# EAGLE board kiwi_exigeant (EAGLE 9.6.0)
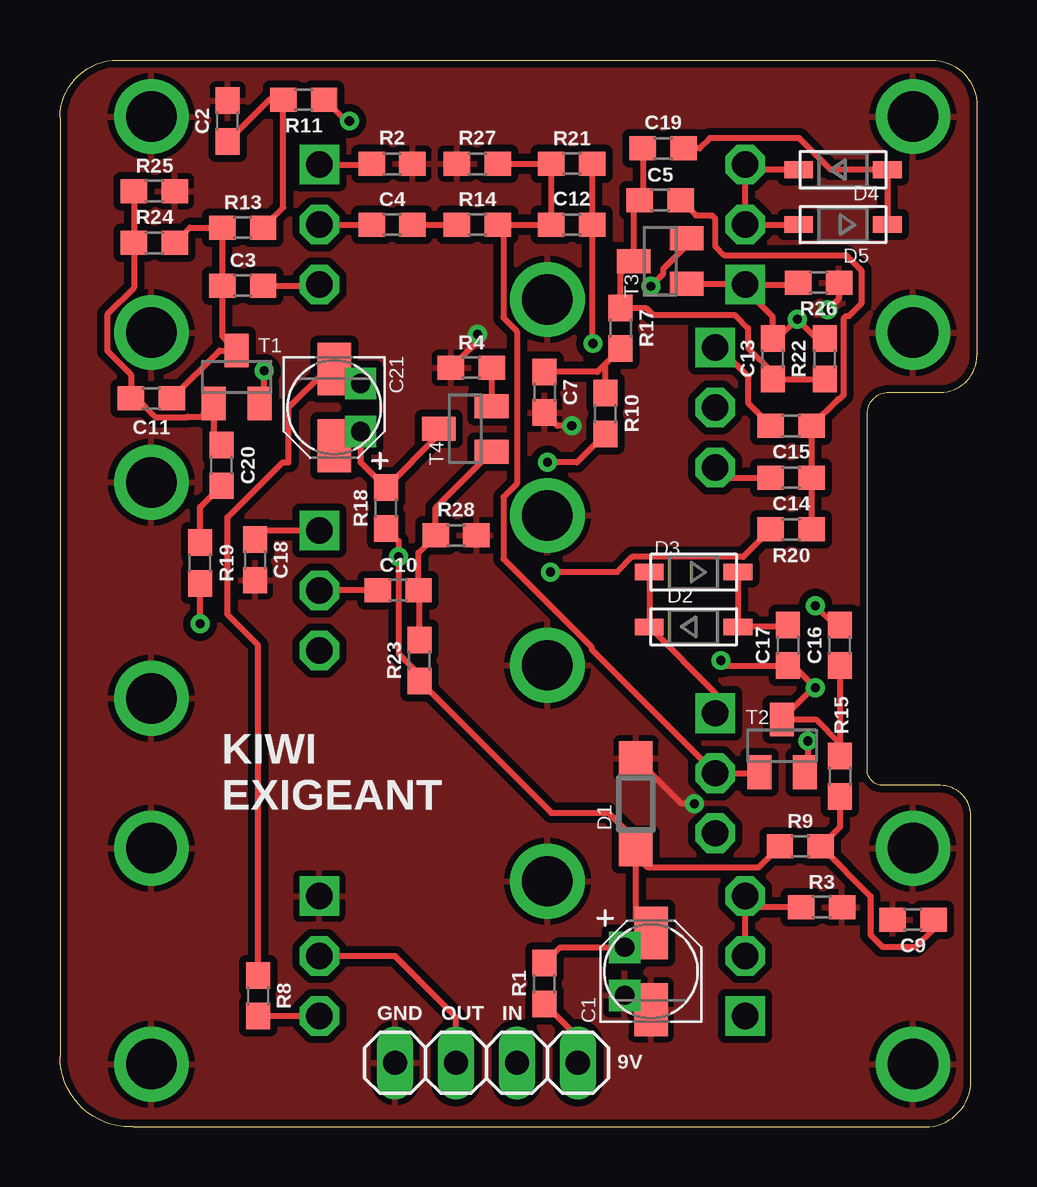
[diagram p0: board, top side]
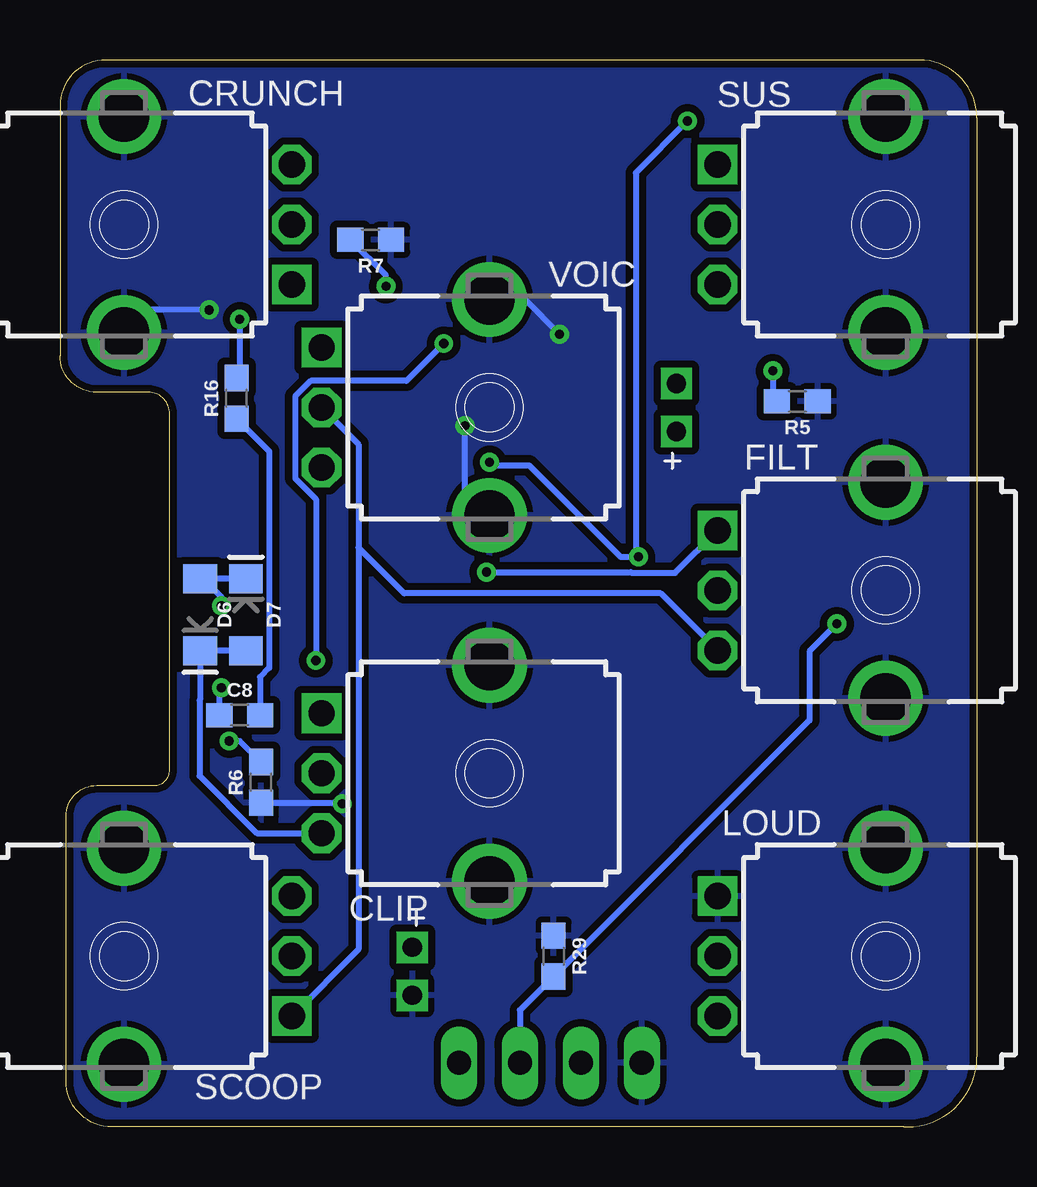
[diagram p1: board, bottom side, seen from below]

Size 38.23 x 44.45 mm. Coordinates in mm from the lower left corner, seen from the top.
Outline: 3.05,0 36.07,0 arc90 37.97,1.91 37.97,12.95 arc90 36.7,14.22 34.29,14.22 arc-90 33.66,14.86 33.66,29.72 arc-90 34.54,30.61 36.7,30.61 arc90 38.23,32.13 38.23,42.55 arc90 36.32,44.45 2.41,44.45 arc90 0,42.04 0,2.92 arc90 2.92,0 3.05,0
Copper layers (1*16): Top 0.035mm / dielectric 1.5mm / Bottom 0.035mm
Design rules "default *": minimum track width 6mil, minimum drill 0.35mm, track to track 6mil, track to pad 6mil, pad to pad 6mil, via to via 6mil, smd to smd 6mil, copper to edge 10mil, drill to drill 6mil, minimum pad ring 10mil, minimum via ring 8mil, stop-mask expansion 4mil, vias tented up to drill 0mil, thermal gap 10mil

## Footprints (pad centres in the part's own frame; a part is rotated, then mirrored left to right if it is on the bottom)
PAN_B_SMD+THRU = smd 2.2 x 1.4: + 1.6,0; - -1.6,0 | drill 0.8 pad 0.9 square: ++ 1,1.1; -- -1,1.1
0603 = smd 1.1 x 1: 1 -0.85,0; 2 0.85,0
9MM_SNAP-IN_POT = drill 1.1 square: 1 -2.5,-7 | drill 1.1 octagon: 2 0,-7; 3 2.5,-7 | drill 2.1 pad 2.794: CHASSIS1 -4.5,0; CHASSIS2 4.5,0
SOD123 = smd 1.4 x 1.4: A 1.9,0; C -1.9,0
SOD-123 = smd 1.2 x 0.7: A 1.85,0; C -1.85,0
LED-1206 = smd 1.2 x 1.4: A -1.5,0; C 1.5,0
1X04 = drill 1.016 long: 1 -3.81,0; 2 -1.27,0; 3 1.27,0; 4 3.81,0
SOT23-BEC = smd 1 x 1.4: B -0.95,-1.1; C 0,1.1; E 0.95,-1.1

## Placement (x,y rotation side)
C1  100uF  [PAN_B_SMD+THRU]  24.64,6.48 90 top
C2  1.0uF  [0603]  6.99,41.91 90 top
C3  1.0uF  [0603]  7.62,35.05 0 top
C4  1.0uF  [0603]  13.84,37.59 0 top
C5  1.0uF  [0603]  25.02,38.61 0 top
C7  1.0uF  [0603]  20.19,30.61 270 top
C8  1.0uF  [0603]  30.73,17.14 0 bottom
C9  1.0uF  [0603]  35.56,8.64 180 top
C10  1.0uF  [0603]  14.1,22.35 0 top
C11  470pF  [0603]  3.81,30.35 180 top
C12  470pF  [0603]  21.34,37.59 180 top
C13  470pF  [0603]  29.72,32 90 top
C14  33nF  [0603]  30.48,27.05 180 top
C15  3.3nF  [0603]  30.48,29.21 180 top
C16  47nF  [0603]  32.51,20.07 90 top
C17  0.1uF  [0603]  30.35,20.07 90 top
C18  0.1uF  [0603]  8.13,23.62 270 top
C19  0.1uF  [0603]  25.15,40.77 180 top
C20  0.1uF  [0603]  6.73,27.56 90 top
C21  47uF  [PAN_B_SMD+THRU]  11.43,29.97 270 top
CLIP  B500K  [9MM_SNAP-IN_POT]  20.32,14.73 270 bottom
CRUNCH  A500K  [9MM_SNAP-IN_POT]  35.56,37.59 90 bottom
D1  1N5819  [SOD123]  24,13.46 90 top
D2  [SOD-123]  26.42,20.83 0 top
D3  [SOD-123]  26.42,23.11 180 top
D4  [SOD-123]  32.64,39.88 0 top
D5  [SOD-123]  32.64,37.59 180 top
D6  [LED-1206]  32.38,21.34 270 bottom
D7  [LED-1206]  30.48,21.34 90 bottom
FILT  B100K  [9MM_SNAP-IN_POT]  3.81,22.35 270 bottom
JP1  PINHD-1X4  [1X04]  17.78,2.67 180 top
LOUD  B100K  [9MM_SNAP-IN_POT]  3.81,7.11 270 bottom
R1  10  [0603]  20.19,5.97 90 top
R2  1k  [0603]  13.84,40.13 180 top
R3  1.5k  [0603]  31.75,9.14 0 top
R4  1.5k  [0603]  17.14,31.62 0 top
R5  100  [0603]  7.49,30.23 180 bottom
R6  100  [0603]  29.84,14.35 90 bottom
R7  100  [0603]  25.27,36.96 180 bottom
R8  150  [0603]  8.26,5.46 270 top
R9  4.7k  [0603]  30.86,11.68 0 top
R10  4.7k  [0603]  22.73,29.72 90 top
R11  4.7k  [0603]  10.16,42.8 180 top
R13  10k  [0603]  7.62,37.47 0 top
R14  10k  [0603]  17.4,37.59 0 top
R15  10k  [0603]  32.51,14.61 270 top
R16  10k  [0603]  30.86,30.35 90 bottom
R17  10k  [0603]  23.37,33.27 270 top
R18  10k  [0603]  13.59,25.78 90 top
R19  33k  [0603]  5.84,23.5 90 top
R20  33k  [0603]  30.48,24.89 180 top
R21  470k  [0603]  21.34,40.13 0 top
R22  470k  [0603]  31.88,32 270 top
R23  470k  [0603]  14.99,19.43 90 top
R24  470k  [0603]  3.94,36.83 180 top
R25  100k  [0603]  3.94,38.99 0 top
R26  100k  [0603]  31.62,35.18 180 top
R27  100k  [0603]  17.4,40.13 180 top
R28  100k  [0603]  16.51,24.64 180 top
R29  1M  [0603]  17.65,7.11 270 bottom
SCOOP  B50K  [9MM_SNAP-IN_POT]  35.56,7.11 90 bottom
SUS  B100K  [9MM_SNAP-IN_POT]  3.81,37.59 270 bottom
T1  3904  [SOT23-BEC]  7.37,31.24 0 top
T2  3904  [SOT23-BEC]  30.1,15.88 0 top
T3  3904  [SOT23-BEC]  25.02,36.07 90 top
T4  3904  [SOT23-BEC]  16.89,29.08 90 top
VOIC  B500K  [9MM_SNAP-IN_POT]  20.32,29.97 270 bottom

## Library data of the parts
C1 C21 CLIP CRUNCH FILT LOUD SCOOP SUS T1-T4 VOIC = MusicThingModular
C2-C5 C7-C10 = SparkFun-Capacitors; PROD_ID: CAP-00868
C11-C13 = SparkFun-Capacitors; PROD_ID: CAP-07884
C14 = SparkFun-Capacitors; PROD_ID: CAP-07887
C15 = SparkFun-Capacitors; PROD_ID: CAP-09633
C16 = SparkFun-Capacitors; PROD_ID: CAP-08605
C17-C20 = SparkFun-Capacitors; PROD_ID: CAP-08604
D1 = diode
D2-D5 = adafruit
D6 D7 = SparkFun-LED
JP1 = Connector; CATEGORY: CONNECTOR; SUB-CATEGORY: PIN-HEADER
R1 = SparkFun-Resistors; PROD_ID: RES-12581
R2-R4 = SparkFun-Resistors; PROD_ID: RES-07856
R5-R7 = SparkFun-Resistors; PROD_ID: RES-12438
R8 = SparkFun-Resistors; PROD_ID: RES-11028
R9-R11 = SparkFun-Resistors; PROD_ID: RES-07857
R13-R18 = SparkFun-Resistors; PROD_ID: RES-00824
R19 R20 = SparkFun-Resistors; PROD_ID: RES-08416
R21-R24 = SparkFun-Resistors; PROD_ID: RES-07869
R25-R28 = SparkFun-Resistors; PROD_ID: RES-07828
R29 = SparkFun-Resistors; PROD_ID: RES-07868

## Nets
CLIP1: CLIP.1 D2.C D3.A
CLIP2: C12.2 CLIP.2 R14.2 R21.1 R27.1 T2.B
CLIP3: CLIP.3 D6.C D7.A
CRU1: C13.2 CRUNCH.1 R16.2 R22.1 R26.2 T3.B
CRU2: CRUNCH.2 CRUNCH.3 D4.C D5.A
FIL1: C18.1 FILT.1 R20.2
FIL2: C10.1 FILT.2
GND: C1.- C1.-- C2.2 C7.2 C9.2 C18.2 CLIP.CHASSIS1 CLIP.CHASSIS2 CRUNCH.CHASSIS1 CRUNCH.CHASSIS2 D1.A FILT.CHASSIS1 FILT.CHASSIS2 JP1.4 LOUD.1 LOUD.CHASSIS1 LOUD.CHASSIS2 R2.1 R3.2 R4.1 R5.1 R6.1 R7.1 R25.2 R26.1 R27.2 R28.1 R29.1 SCOOP.CHASSIS1 SCOOP.CHASSIS2 SUS.CHASSIS1 SUS.CHASSIS2 VOIC.CHASSIS1 VOIC.CHASSIS2
IN: JP1.2 R19.1 R29.2
LOU3: LOUD.3 R8.2
N$1: C2.1 R11.2 R13.2
N$2: C4.2 R14.1
N$3: C16.2 D6.A D7.C
N$4: C17.2 D2.A D3.C
N$5: C8.2 R16.1
N$6: C7.1 R10.2 R17.2
N$7: C19.1 D4.A D5.C
N$8: C5.2 C14.1 C15.1 R20.1
N$10: C10.2 R23.2 R28.2 T4.B
N$11: R4.2 T4.E
N$12: C21.+ C21.++ R18.2 T4.C
N$13: C21.- C21.-- R8.1
N$22: C8.1 C12.1 C16.1 C17.1 R15.1 R21.2 T2.C
N$23: R6.2 T2.E
N$24: C20.1 R19.2
N$25: JP1.1 R1.1
N$26: C11.2 C20.2 R24.2 R25.1 T1.B
N$27: R5.2 T1.E
N$28: C3.1 C11.1 R13.1 R24.1 T1.C
N$29: C9.1 R9.2 R15.2
N$30: C5.1 C13.1 C19.2 R17.1 R22.2 T3.C
N$31: R7.2 T3.E
OUT: JP1.3 LOUD.2
SCO2: R3.1 SCOOP.2 SCOOP.3
SUS1: R2.2 SUS.1
SUS2: C4.1 SUS.2
SUS3: C3.2 SUS.3
VCC: C1.+ C1.++ D1.C R1.2 R9.1 R10.1 R11.1 R18.1 R23.1
VOI1: C15.2 VOIC.1
VOI2: FILT.3 SCOOP.1 VOIC.2
VOI3: C14.2 VOIC.3

## Tracks (layer width: path | path; a pad name or v marks a point on that pad's centre or on a via)
CLIP1
  Top 0.254: D3.A D2.C 27.32,18.07 CLIP.1
CLIP2
  Top 0.254: T2.B 29.11,14.73 CLIP.2 22.16,19.89 22.16,19.99 18.48,23.67 18.48,26.23 19.05,26.8 19.05,33.14 18.48,33.71 18.48,37.36 R14.2 C12.2 R21.1 R27.1
CLIP3
  Bottom 0.254: D7.A D6.C 32.38,17.79 32.41,17.76 32.41,14.62 30.02,12.23 CLIP.3
CRU1  (via drill 0.38)
  Top 0.254: CRUNCH.1 28.56,34.9 29.72,33.74 C13.2 29.93,32.85 v30.73,33.66 31.54,32.85 R22.1 | T3.B 28.53,35.12 CRUNCH.1 | CRUNCH.1 30.69,35.09 R26.2
  Bottom 0.254: v30.73,33.66 30.73,31.33 R16.2
CRU2
  Top 0.254: D5.A CRUNCH.2 CRUNCH.3 28.77,39.88 D4.C
FIL1  (via drill 0.38)
  Top 0.254: C18.1 8.51,24.85 FILT.1 | R20.2 28.48,23.74 23.85,23.74 23.22,23.11 v20.45,23.11
  Bottom 0.254: v20.45,23.11 14.44,23.11 14.4,23.08 12.59,23.08 FILT.1
FIL2
  Top 0.254: C10.1 FILT.2
GND  (via drill 0.38)
  Top 0.254: v21.34,29.21 20.74,29.21 C7.2 | R4.1 17.4,32.73 v17.4,33.02 | v26.45,13.46 25.9,13.46 D1.A | R26.1 32.47,34.51 v32,34.04
  Bottom 0.254: VOIC.CHASSIS2 21.34,26.49 v21.34,29.21 | v17.4,33.02 18.85,34.47 VOIC.CHASSIS1 | R6.1 26.49,13.5 v26.45,13.46 | v32,34.04 34.62,34.04 CRUNCH.CHASSIS1
  pour Bottom (isolate 0.305): -0.89,-0.89 38.99,-0.89 39.37,-0.51 39.37,45.21 39.24,45.34 38.99,45.59 -0.51,45.59 -0.51,-0.51
  pour Top (isolate 0.305): -0.64,-0.89 38.99,-0.89 39.37,-0.51 39.37,44.58 38.48,45.47 -0.51,45.47 -0.51,-0.76
IN  (via drill 0.38)
  Top 0.254: v5.84,20.95 R19.1
  Bottom 0.254: JP1.2 19.05,4.87 R29.2 6.99,16.93 6.99,19.81 v5.84,20.95
LOU3
  Top 0.254: LOUD.3 R8.2
N$1
  Top 0.254: C2.1 8.72,42.8 R11.2 9.31,38.3 R13.2
N$2
  Top 0.254: C4.2 R14.1
N$3  (via drill 0.38)
  Top 0.254: C16.2 32.3,20.92 v31.5,21.72
  Bottom 0.254: D7.C 32.26,22.84 | 32.26,22.84 D6.A | v31.5,21.72 31.5,22.07 32.26,22.84
N$4
  Top 0.254: C17.2 30.27,20.83 D2.A D3.C
N$5
  Bottom 0.254: C8.2 29.88,18.74 29.5,19.12 29.5,24.64 29.5,28.14 R16.1
N$6
  Top 0.254: R10.2 22.73,31.79 R17.2 22.4,31.46 C7.1
N$7
  Top 0.254: D5.C D4.A 32.13,39.88 30.82,41.2 27.09,41.2 26.66,40.77 C19.1
N$8
  Top 0.254: R20.1 C14.1 C15.1 32.45,30.32 32.49,30.32 32.66,30.49 32.66,33.67 32.77,33.78 32.89,33.78 33.4,34.29 33.4,35.7 32.77,36.32 27.69,36.32 27.3,36.7 27.3,37.85 27.18,37.97 26.5,37.97 C5.2
N$10
  Top 0.254: T4.B 15.66,25.8 R28.2 14.95,23.93 C10.2 14.99,22.31 R23.2
N$11
  Top 0.254: R4.2 T4.E
N$12
  Top 0.254: T4.C 15.79,28.83 R18.2 12.53,27.69 C21.++ 12.03,28.97 C21.+
N$13
  Top 0.254: C21.- 11.53,31.47 | 11.53,31.47 12.03,30.97 C21.-- | R8.1 8.26,20.07 6.99,21.34 6.99,25.4 9.27,27.69 9.53,27.69 9.53,29.97 11.02,31.47 11.53,31.47
N$22  (via drill 0.38)
  Top 0.254: C16.1 R15.1 32.51,15.96 31.5,16.98 T2.C 31.41,18.29 v31.5,18.29 30.57,19.22 C17.1 27.77,19.22 v27.56,19.43 | R21.2 C12.1 22.19,32.68 v22.23,32.64
  Bottom 0.254: v31.5,18.29 31.58,18.2 C8.1 | v27.56,19.43 27.56,26.15 28.42,27.02 28.42,30.43 27.78,31.08 23.79,31.08 v22.23,32.64
N$23  (via drill 0.38)
  Top 0.254: v31.17,16.07 31.17,14.9 T2.E
  Bottom 0.254: R6.2 30.72,16.07 v31.17,16.07
N$24
  Top 0.254: R19.2 5.84,25.82 C20.1
N$25
  Top 0.254: R1.1 21.59,3.72 JP1.1
N$26
  Top 0.254: R25.1 R24.2 3.09,34.97 1.97,33.85 1.97,32.33 2.96,31.34 C11.2 3.21,30.35 3.99,29.57 5.33,29.57 5.34,29.59 5.87,29.59 T1.B 6.42,28.72 C20.2
N$27  (via drill 0.38)
  Top 0.254: T1.E 8.51,30.34 v8.51,31.5
  Bottom 0.254: v8.51,31.5 8.51,30.39 R5.2
N$28
  Top 0.254: R24.1 5.42,37.47 R13.1 C3.1 6.77,32.94 T1.C 6.65,32.34 C11.1
N$29
  Top 0.254: R15.2 32.51,12.48 R9.2 33.78,9.61 33.78,8 34.29,7.49 35.69,7.49 36.41,8.22 C9.1
N$30
  Top 0.254: C19.2 24.3,38.73 C5.1 23.92,38.36 T3.C 23.37,35.52 R17.1 24.42,34.12 24.72,33.83 28.13,33.83 28.68,33.28 28.68,32.44 29.72,31.41 C13.1 R22.2
N$31  (via drill 0.38)
  Top 0.254: v24.64,35.02 25.14,35.52 25.14,35.73 26.12,36.71 T3.E
  Bottom 0.254: v24.64,35.02 24.64,35.47 R7.2
OUT
  Top 0.254: JP1.3 16.51,4.57 13.97,7.11 LOUD.2
SCO2
  Top 0.254: R3.1 29.03,9.14 SCOOP.3 SCOOP.2
SUS1
  Top 0.254: SUS.1 12.95,40.09 R2.2
SUS2
  Top 0.254: SUS.2 C4.1
SUS3
  Top 0.254: C3.2 10.77,35.05 SUS.3
VCC  (via drill 0.38)
  Top 0.254: R1.2 20.85,7.48 C1.++ 24.14,8.08 C1.+ 24,8.71 24,11.3 | 24,11.3 D1.C 24,11.94 22.86,13.08 20.49,13.08 R23.1 14.99,18.84 14.12,19.7 v14.12,23.75 14.12,24.4 R18.1 | R9.1 29.12,10.79 24.51,10.79 24,11.3 | R10.1 21.55,27.69 v20.32,27.69 | R11.1 11.9,41.91 v12.06,41.91
  Bottom 0.254: v20.32,27.69 20.2,27.56 18.67,27.56 14.86,23.75 14.22,23.75 | 14.22,23.75 v14.12,23.75 | v12.06,41.91 14.22,39.75 14.22,23.75
VOI1
  Top 0.254: C15.2 28.7,30.14 28.7,31.24 27.47,32.47 VOIC.1
VOI2
  Bottom 0.254: VOIC.2 25.78,28.43 25.78,24.13 | SCOOP.1 25.78,7.39 25.78,24.13 | FILT.3 13.18,22.23 23.88,22.23 25.78,24.13
VOI3
  Top 0.254: VOIC.3 27.74,27.05 C14.2

## Text on the board
tPlace: KIWI / EXIGEANT | GND | OUT | IN | 9V